# EAGLE board CntrlBoard (EAGLE 6.5.0)
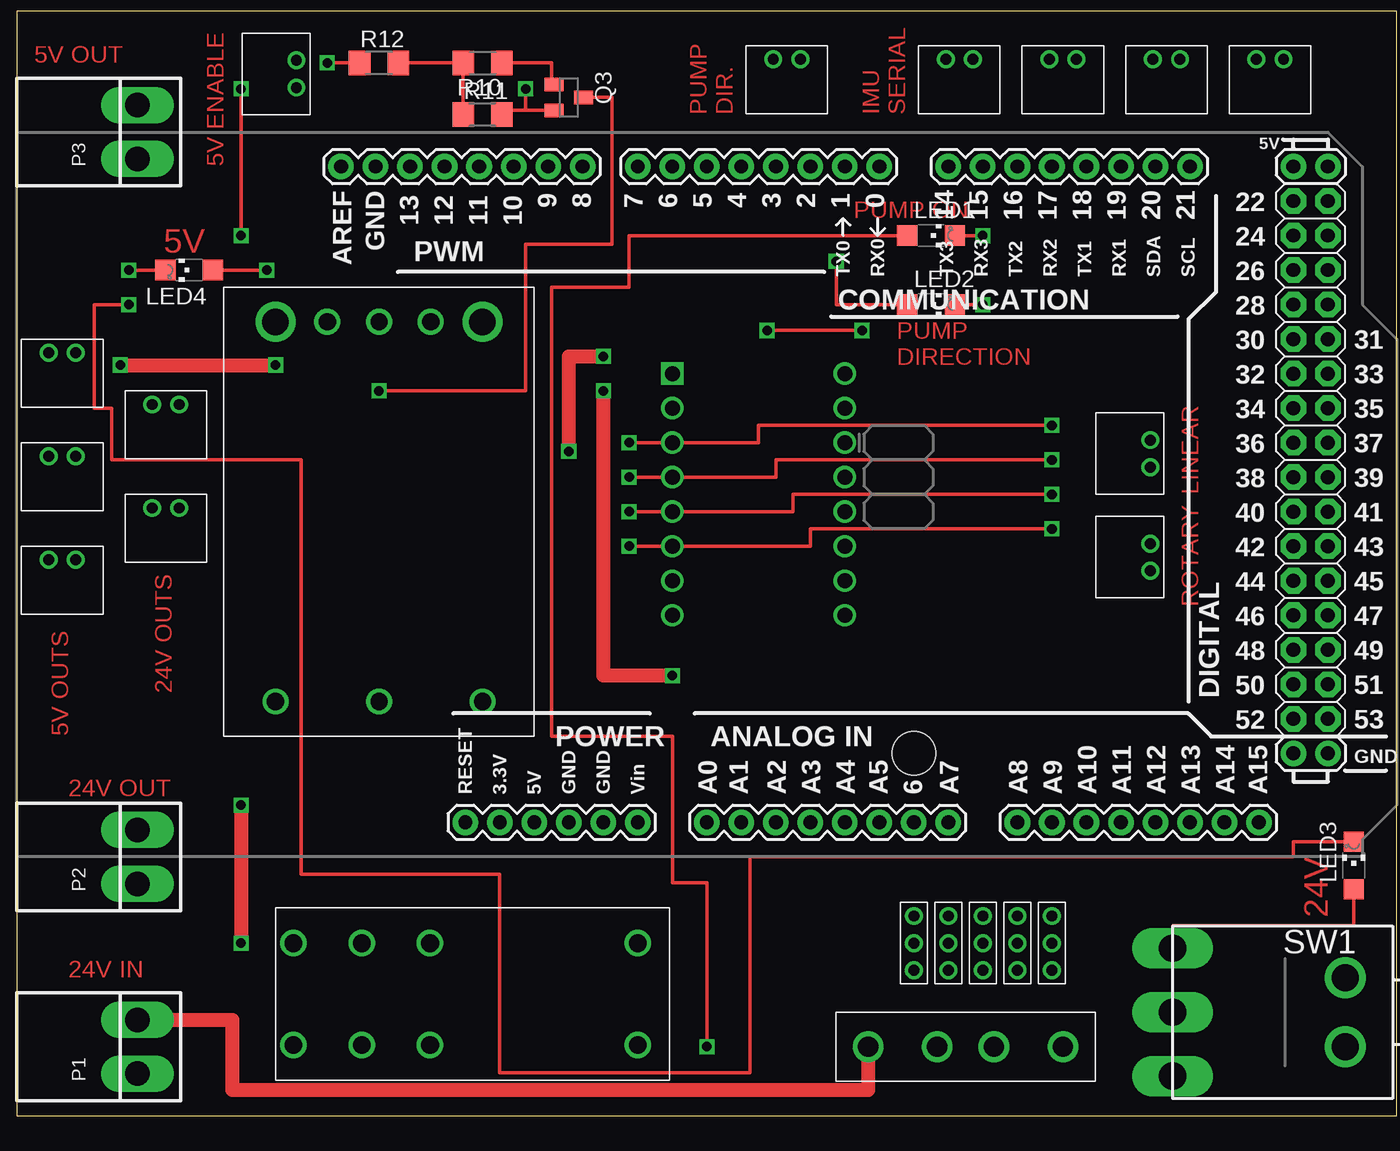
[diagram p0: board, top side]
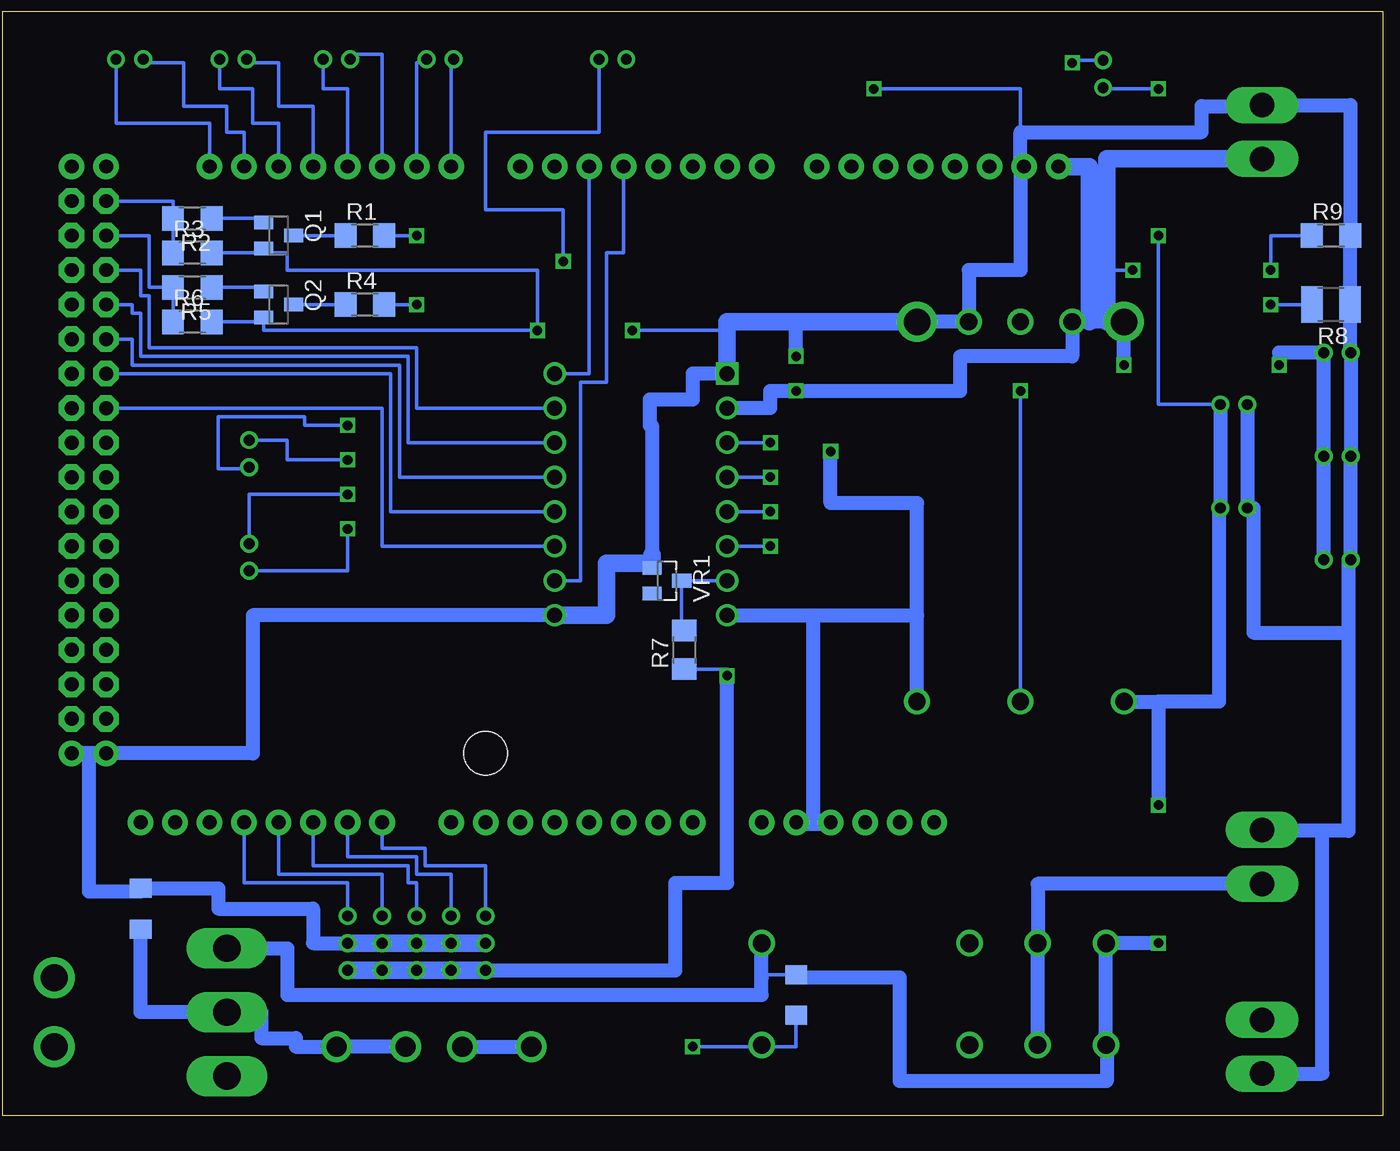
[diagram p1: board, bottom side, seen from below]

No outline drawn. Coordinates in mm, seen from the top.
Copper layers (1*16): Top 0.035mm / dielectric 1.5mm / Bottom 0.035mm
Design rules "default *": minimum track width 10mil, minimum drill 24mil, track to track 10mil, track to pad 10mil, pad to pad 10mil, via to via 10mil, smd to smd 10mil, copper to edge 40mil, drill to drill 10mil, minimum pad ring 10mil, minimum via ring 8mil, stop-mask expansion 4mil, vias tented up to drill 0mil, thermal gap 10mil
Milling: 4 lines

## Footprints (pad centres in the part's own frame; a part is rotated, then mirrored left to right if it is on the bottom)
CD1206 = smd 1.397 x 1.6: A -1.499,0; K 1.499,0
CHIPLED_1206 = smd 1.5 x 1.5: A 0,-1.75; C 0,1.75
22-23-2021 = drill 1.801 long: 1 -1.981,0; 2 1.981,0
DF3A-2P-2DSA = drill 0.8: P$1 2,1.001; P$2 4,1.001
3PIN_2MMPITCH = drill 0.8: P$1 -1.999,0; P$2 0,0; P$3 1.999,0
KHHD006A0A41Z = drill 1.27: P$1 2.54,19.05; P$2 2.54,11.43; P$3 2.54,3.81; P$5 30.48,7.62; P$6 30.48,11.43; P$7 30.48,15.24 | drill 1.956: P$4 30.48,3.81; P$8 30.48,19.05
SOT23 = smd 1 x 1.4: 1 -0.95,-1.1; 2 0.95,-1.1; 3 0,1.1
R1206 = smd 1.6 x 1.803: 1 -1.422,0; 2 1.422,0
R1210 = smd 1.6 x 2.7: 1 -1.4,0; 2 1.4,0
RTE = drill 1.3: P$1 0,0; P$2 15.291,0; P$3 20.32,0; P$4 25.349,0; P$5 25.349,7.493; P$6 20.32,7.493; P$7 15.291,7.493; P$8 0,7.493
TL3XWO = drill 1.999 long: 1 -4.699,-12.7; 2 0,-12.7; 3 4.699,-12.7 | drill 1.999: M1 -2.54,0; M2 2.54,0
ARDUINO_MEGA = drill 1.016 pad 1.88: 0 63.5,50.8; 1 60.96,50.8; 2 58.42,50.8; 3 55.88,50.8; 3.3V 35.56,2.54; 4 53.34,50.8; 5 50.8,50.8; 5V@0 38.1,2.54; 5V@1 93.98,50.8; 5V@2 96.52,50.8; 6 48.26,50.8; 7 45.72,50.8; 8 41.656,50.8; 9 39.116,50.8; 10 36.576,50.8; 11 34.036,50.8; 12 31.496,50.8; 13 28.956,50.8; 14 68.58,50.8; 15 71.12,50.8; 16 73.66,50.8; 17 76.2,50.8; 18 78.74,50.8; 19 81.28,50.8; 20 83.82,50.8; 21 86.36,50.8; A0 50.8,2.54; A1 53.34,2.54; A2 55.88,2.54; A3 58.42,2.54; A4 60.96,2.54; A5 63.5,2.54; A6 66.04,2.54; A7 68.58,2.54; A8 73.66,2.54; A9 76.2,2.54; A10 78.74,2.54; A11 81.28,2.54; A12 83.82,2.54; A13 86.36,2.54; A14 88.9,2.54; A15 91.44,2.54; AREF 23.876,50.8; GND@0 40.64,2.54; GND@1 43.18,2.54; GND@2 93.98,7.62; GND@3 96.52,7.62; GND@4 26.416,50.8; RESET 33.02,2.54; VIN 45.72,2.54 | drill 1.016 pad 1.88 octagon: 22 93.98,48.26; 23 96.52,48.26; 24 93.98,45.72; 25 96.52,45.72; 26 93.98,43.18; 27 96.52,43.18; 28 93.98,40.64; 29 96.52,40.64; 30 93.98,38.1; 31 96.52,38.1; 32 93.98,35.56; 33 96.52,35.56; 34 93.98,33.02; 35 96.52,33.02; 36 93.98,30.48; 37 96.52,30.48; 38 93.98,27.94; 39 96.52,27.94; 40 93.98,25.4; 41 96.52,25.4; 42 93.98,22.86; 43 96.52,22.86; 44 93.98,20.32; 45 96.52,20.32; 46 93.98,17.78; 47 96.52,17.78; 48 93.98,15.24; 49 96.52,15.24; 50 93.98,12.7; 51 96.52,12.7; 52 93.98,10.16; 53 96.52,10.16 | hole 3.2: 66.04,7.62
FUSE_HOLDER_ATC = drill 1.5: P$1 -7.163,0; P$2 -2.083,0; P$3 2.083,0; P$4 7.163,0
POLOLU713 = drill 1.1: AIN1 13.97,13.97; AIN2 13.97,16.51; AO1 1.27,13.97; AO2 1.27,11.43; BIN1 13.97,8.89; BIN2 13.97,6.35; BO1 1.27,6.35; BO2 1.27,8.89; GND_2 1.27,1.27; GND_3 13.97,1.27; PWMA 13.97,19.05; PWMB 13.97,3.81; STDBY_N 13.97,11.43; VCC 1.27,16.51; VMOT 1.27,3.81 | drill 1.1 square: GND1 1.27,19.05

## Placement (x,y rotation side)
D1  CD1206-S01575  [CD1206]  43.18,8.89 90 bottom
D2  CD1206-S01575  [CD1206]  91.44,15.24 270 bottom
LED1  [CHIPLED_1206]  67.31,64.77 270 top
LED2  [CHIPLED_1206]  67.31,59.69 270 top
LED3  [CHIPLED_1206]  98.42,18.41 0 top
LED4  [CHIPLED_1206]  12.7,62.23 90 top
P1  22-23-2021  [22-23-2021]  8.89,5.08 90 top
P2  22-23-2021  [22-23-2021]  8.89,19.05 90 top
P3  22-23-2021  [22-23-2021]  8.89,72.39 90 top
P4  DF3A-2P-2DSA  [DF3A-2P-2DSA]  84.45,45.72 90 top
P5  DF3A-2P-2DSA  [DF3A-2P-2DSA]  84.45,38.1 90 top
P6  DF3A-2P-2DSA  [DF3A-2P-2DSA]  21.59,73.66 90 top
P7  3PIN2MMPITCH  [3PIN_2MMPITCH]  66.04,12.7 270 top
P8  3PIN2MMPITCH  [3PIN_2MMPITCH]  68.58,12.7 270 top
P9  3PIN2MMPITCH  [3PIN_2MMPITCH]  71.12,12.7 270 top
P10  3PIN2MMPITCH  [3PIN_2MMPITCH]  73.66,12.7 270 top
P11  3PIN2MMPITCH  [3PIN_2MMPITCH]  76.2,12.7 270 top
P12  DF3A-2P-2DSA  [DF3A-2P-2DSA]  13.97,45.72 180 top
P13  DF3A-2P-2DSA  [DF3A-2P-2DSA]  13.97,53.34 180 top
P14  DF3A-2P-2DSA  [DF3A-2P-2DSA]  6.35,57.15 180 top
P15  DF3A-2P-2DSA  [DF3A-2P-2DSA]  6.35,41.91 180 top
P16  DF3A-2P-2DSA  [DF3A-2P-2DSA]  6.35,49.53 180 top
P17  DF3A-2P-2DSA  [DF3A-2P-2DSA]  72.39,78.74 180 top
P18  DF3A-2P-2DSA  [DF3A-2P-2DSA]  87.63,78.74 180 top
P19  DF3A-2P-2DSA  [DF3A-2P-2DSA]  80.01,78.74 180 top
P20  DF3A-2P-2DSA  [DF3A-2P-2DSA]  95.25,78.74 180 top
P21  DF3A-2P-2DSA  [DF3A-2P-2DSA]  59.69,78.74 180 top
PS1  KHHD006A0A41Z  [KHHD006A0A41Z]  38.1,27.94 90 top
Q1  BSS123  [SOT23]  81.28,64.77 270 bottom
Q2  BSS123  [SOT23]  81.28,59.69 270 bottom
Q3  BSS123  [SOT23]  40.64,74.93 270 top
R1  [R1206]  74.93,64.77 0 bottom
R2  100R  [R1206]  87.63,66.04 180 bottom
R3  1K0  [R1206]  87.63,63.5 0 bottom
R4  [R1206]  74.93,59.69 0 bottom
R5  100R  [R1206]  87.63,60.96 180 bottom
R6  1K0  [R1206]  87.63,58.42 0 bottom
R7  [R1206]  51.44,34.29 90 bottom
R8  1K8  [R1210]  3.81,59.69 180 bottom
R9  113R  [R1206]  3.81,64.77 0 bottom
R10  100R  [R1206]  34.29,77.47 180 top
R11  1K0  [R1206]  34.29,73.66 0 top
R12  2K8  [R1206]  26.67,77.47 0 top
RL1  RTE  [RTE]  45.72,12.7 180 top
SW1  TL32WO  [TL3XWO]  97.79,7.62 270 top
U1  ARDUINO-MEGAFULL  [ARDUINO_MEGA]  0,19.05 0 top
U$1  ATC_FUSE_HOLDER  [FUSE_HOLDER_ATC]  69.85,5.08 180 top
U$2  POLOLU713  [POLOLU713]  46.99,35.56 0 top
VR1  [SOT23]  52.7,39.37 270 bottom

## Library data of the parts
D1 D2 VR1 = diode
LED1-LED4 = led
P1-P3 = con-molex; MF: MOLEX; MPN: 22-23-2021; OC_FARNELL: 1462926; OC_NEWARK: 25C3832
P4-P21 = con-3m
PS1 = dc-dc-converter
Q1-Q3 = transistor-small-signal
R1-R12 = resistor
RL1 = relay
SW1 = switch
U1 = SparkFun-Boards
U$1 = fuse
U$2 = adafruit

## Nets
+5V: LED4.A P3.1 P7.P$3 P8.P$3 P9.P$3 P10.P$3 P11.P$3 P14.P$1 P15.P$1 P16.P$1 PS1.P$7 PS1.P$8 R7.1 U1.AREF U$2.VCC
AIN1: U1.28 U$2.AIN1
AIN2: U1.26 U$2.AIN2
BIN1: U1.32 U$2.BIN1
BIN2: U1.34 U$2.BIN2
GND: D2.A P1.1 P2.2 P3.2 P7.P$2 P8.P$2 P9.P$2 P10.P$2 P11.P$2 P12.P$2 P13.P$2 P14.P$2 P15.P$2 P16.P$2 PS1.P$3 PS1.P$4 PS1.P$5 Q1.2 Q2.2 Q3.2 R3.2 R6.2 R8.1 R9.2 R11.2 U1.GND@0 U1.GND@1 U1.GND@2 U1.GND@3 U1.GND@4 U$2.GND1 U$2.GND_2 U$2.GND_3 VR1.1
IMU_RX: P17.P$2 U1.14
IMU_TX: P17.P$1 U1.15
LIN_POS: P8.P$1 U1.A9
N$1: P1.2 U$1.P$3 U$1.P$4
N$2: D1.A LED1.A RL1.P$8
N$3: D2.K SW1.2 U$1.P$1 U$1.P$2
N$4: P2.1 RL1.P$3 RL1.P$6
N$5: LED1.C R1.2
N$6: Q1.3 R1.1
N$7: Q2.3 R4.1
N$8: Q1.1 R2.1
N$9: LED2.C R4.2
N$10: LED4.C R9.1
N$11: Q2.1 R5.1
N$12: LED3.C R8.2
N$13: R10.2 R11.1 R12.2
N$14: Q3.1 R10.1
N$15: P6.P$2 R12.1
N$16: PS1.P$2 Q3.3
N$17: P4.P$1 U$2.AO1
N$18: P4.P$2 U$2.AO2
N$19: P5.P$1 U$2.BO1
N$20: P5.P$2 U$2.BO2
N$21: R7.2 U$2.VMOT VR1.3
PUMP_DIR: R5.2 R6.1 U1.24
PUMP_DIR_RELAY: LED2.A P21.P$1
PUMP_ON: R2.2 R3.1 U1.22
PWMA: U1.2 U$2.PWMA
PWMB: U1.3 U$2.PWMB
ROT_POS: P9.P$1 U1.A10
RX1: P18.P$1 U1.19
RX2: P19.P$1 U1.17
SCL: P20.P$1 U1.21
SDA: P20.P$2 U1.20
SPARE_ANALOG1: P10.P$1 U1.A11
SPARE_ANALOG2: P11.P$1 U1.A12
STDBY_N: U1.30 U$2.STDBY_N
TANK_LEVEL: P7.P$1 U1.A8
TX1: P18.P$2 U1.18
TX2: P19.P$2 U1.16
VCC: D1.K LED3.A P6.P$1 P12.P$1 P13.P$1 PS1.P$1 RL1.P$1 RL1.P$4 RL1.P$5 SW1.1

## Tracks (layer width: path | path; a pad name or v marks a point on that pad's centre or on a via)
+5V  (via drill 0.7)
  Top 0.254: LED4.A v18.41,62.23
  Top 1.016: v7.62,55.24 v19.05,55.24 | v48.26,32.38 43.18,32.38 v43.18,53.34
  Bottom 0.254: v18.41,62.23 20.32,62.23 | R7.1 48.26,32.87 v48.26,32.38
  Bottom 1.016: 20.32,58.42 21.59,58.42 PS1.P$7 22.86,55.88 31.11,55.88 31.11,53.34 v43.18,53.34 45.09,53.34 45.09,52.07 U$2.VCC | P15.P$1 P16.P$1 P14.P$1 7.62,56.15 v7.62,55.24 | v19.05,55.24 PS1.P$8 | P7.P$3 52.07,10.7 52.07,17.14 48.26,17.14 v48.26,32.38
  Bottom 1.27: PS1.P$8 20.32,58.42 20.32,62.23 20.32,70.41 P3.1 | U1.AREF 21.59,69.85 21.59,58.42 | P7.P$3 P8.P$3 P9.P$3 P10.P$3 P11.P$3
AIN1
  Bottom 0.254: U1.28 92.08,59.69 92.08,59.05 91.44,59.05 91.44,55.88 71.75,55.88 71.75,49.53 U$2.AIN1
AIN2
  Bottom 0.254: U1.26 91.44,62.23 91.44,60.33 90.81,60.33 90.81,56.52 71.12,56.52 71.12,52.07 U$2.AIN2
BIN1
  Bottom 0.254: U1.32 73.03,54.61 73.03,44.45 U$2.BIN1
BIN2
  Bottom 0.254: U1.34 73.66,52.07 73.66,41.91 U$2.BIN2
GND  (via drill 0.7)
  Top 0.254: R11.2 35.71,73.98 37.47,73.98 | Q3.2 37.47,73.98 | 37.47,73.98 v37.47,75.56 | v62.23,57.78 v55.24,57.78
  Top 1.016: v40.64,48.9 40.64,55.88 v43.18,55.88
  Bottom 0.254: R3.2 82.38,63.5 | 82.38,63.5 Q1.2 | R6.2 82.38,58.42 Q2.2 82.38,57.78 v62.23,57.78 62.23,62.23 80.64,62.23 80.64,63.5 82.38,63.5 | v37.47,75.56 26.67,75.56 26.67,72.39 | v55.24,57.78 48.26,57.78
  Bottom 1.016: P1.1 4.45,3.1 4.45,20.95 | 4.45,20.95 8.89,20.95 P2.2 | 2.54,35.56 2.54,40.91 P15.P$2 P16.P$2 P14.P$2 2.41,56.15 R8.1 2.39,59.69 R9.2 2.39,74.37 8.26,74.37 | 2.54,35.56 2.54,20.95 4.45,20.95 | 2.54,35.56 9.53,35.56 9.53,44.72 P12.P$2 P13.P$2 | PS1.P$4 PS1.P$5 30.48,62.23 26.67,62.23 26.67,69.85 | P3.2 8.26,74.37 | U1.GND@4 26.67,69.85 | 26.67,69.85 26.67,72.39 13.34,72.39 13.34,74.3 8.26,74.3 8.26,74.37 | P11.P$2 78.74,12.7 78.74,15.24 85.72,15.24 85.72,16.74 D2.A 91.44,16.51 95.25,16.51 95.25,26.67 U1.GND@3 U1.GND@2 83.19,26.67 83.19,36.83 U$2.GND_3 | U$2.GND1 50.8,54.61 50.8,52.7 53.98,52.7 53.98,50.8 53.8,50.8 53.8,41.27 VR1.1 | PS1.P$3 34.29,36.83 | 34.29,36.83 34.29,45.09 40.64,45.09 v40.64,48.9 | v43.18,55.88 43.18,58.42 | U$2.GND_2 41.91,36.83 | 41.91,36.83 34.29,36.83 | U1.GND@0 41.91,21.59 41.91,36.83
  Bottom 1.27: U1.GND@0 U1.GND@1 | PS1.P$4 43.18,58.42 48.26,58.42 48.26,57.78 U$2.GND1 | P11.P$2 P10.P$2 P9.P$2 P8.P$2 P7.P$2 | U$2.GND_3 57.15,36.83 57.15,40.64 53.8,40.64 53.8,41.27
IMU_RX
  Bottom 0.254: P17.P$2 68.58,77.74 U1.14
IMU_TX
  Bottom 0.254: U1.15 71.12,77.47 70.39,77.47 P17.P$1
LIN_POS
  Bottom 0.254: U1.A9 76.2,19.05 71.12,19.05 71.12,17.78 68.58,17.78 P8.P$1
N$1
  Top 1.016: P1.2 15.88,7.06 15.88,1.91 62.69,1.91 U$1.P$4
  Bottom 1.016: U$1.P$3 U$1.P$4
N$2  (via drill 0.7)
  Top 0.254: LED1.A 45.09,64.77 45.09,60.96 39.37,60.96 39.37,27.94 48.26,27.94 48.26,17.14 50.8,17.14 v50.8,5.08
  Bottom 0.254: D1.A 43.18,5.08 45.72,5.08 | v50.8,5.08 45.72,5.08 | 45.72,5.08 RL1.P$8
N$3
  Bottom 1.016: U$1.P$2 U$1.P$1 80.01,5.08 80.01,5.71 82.55,5.71 82.55,7.62 SW1.2 91.44,7.62 D2.K
N$4
  Bottom 1.016: RL1.P$6 RL1.P$3 25.4,17.07 P2.1
N$5  (via drill 0.7)
  Top 0.254: v71.12,64.77 LED1.C
  Bottom 0.254: R1.2 v71.12,64.77
N$6
  Bottom 0.254: Q1.3 R1.1
N$7
  Bottom 0.254: Q2.3 R4.1
N$8
  Bottom 0.254: R2.1 82.38,66.04 Q1.1
N$9  (via drill 0.7)
  Top 0.254: v71.12,59.69 LED2.C
  Bottom 0.254: R4.2 v71.12,59.69
N$10  (via drill 0.7)
  Top 0.254: v8.26,62.23 LED4.C
  Bottom 0.254: R9.1 8.26,64.77 v8.26,62.23
N$11
  Bottom 0.254: R5.1 82.38,60.96 Q2.1
N$12  (via drill 0.7)
  Top 0.254: LED3.C 93.98,20.16 93.98,19.05 53.98,19.05 53.98,3.17 35.56,3.17 35.56,17.78 20.95,17.78 20.95,48.26 6.99,48.26 6.99,52.07 5.71,52.07 5.71,59.69 v8.26,59.69
  Bottom 0.254: v8.26,59.69 R8.2
N$13
  Top 0.254: R12.2 R10.2 R11.1
N$14
  Top 0.254: Q3.1 39.37,75.88 39.37,77.47 R10.1
N$15  (via drill 0.7)
  Top 0.254: v22.86,77.47 R12.1
  Bottom 0.254: P6.P$2 22.86,77.66 v22.86,77.47
N$16  (via drill 0.7)
  Top 0.254: Q3.3 43.81,74.93 43.81,64.14 37.47,64.14 37.47,53.34 v26.67,53.34
  Bottom 0.254: v26.67,53.34 PS1.P$2
N$17  (via drill 0.7)
  Top 0.254: v45.09,49.53 54.61,49.53 54.61,50.8 v76.2,50.8
  Bottom 0.254: U$2.AO1 v45.09,49.53 | v76.2,50.8 79.38,50.8 79.38,51.44 85.72,51.44 85.72,47.62 83.45,47.62 P4.P$1
N$18  (via drill 0.7)
  Top 0.254: v45.09,46.99 55.88,46.99 55.88,48.26 v76.2,48.26
  Bottom 0.254: U$2.AO2 v45.09,46.99 | P4.P$2 80.64,49.72 80.64,48.26 v76.2,48.26
N$19  (via drill 0.7)
  Top 0.254: v45.09,41.91 58.42,41.91 58.42,43.18 v76.2,43.18
  Bottom 0.254: U$2.BO1 v45.09,41.91 | P5.P$1 76.2,40.1 v76.2,43.18
N$20  (via drill 0.7)
  Top 0.254: v45.09,44.45 57.15,44.45 57.15,45.72 v76.2,45.72
  Bottom 0.254: U$2.BO2 v45.09,44.45 | v76.2,45.72 83.45,45.72 P5.P$2
N$21
  Bottom 0.254: U$2.VMOT VR1.3 51.6,35.71 R7.2
PUMP_DIR
  Bottom 0.254: U1.24 90.81,64.77 90.81,60.96 R5.2 R6.1
PUMP_DIR_RELAY  (via drill 0.7)
  Top 0.254: LED2.A 60.33,59.69 v60.33,62.87
  Bottom 0.254: v60.33,62.87 60.33,66.67 66.04,66.67 66.04,72.39 57.69,72.39 P21.P$1
PUMP_ON
  Bottom 0.254: U1.22 89.05,67.31 R2.2 R3.1
PWMA
  Bottom 0.254: U$2.PWMA 58.42,54.61 U1.2
PWMB
  Bottom 0.254: U$2.PWMB 59.05,39.37 59.05,53.98 57.15,53.98 57.15,63.5 55.88,63.5 U1.3
ROT_POS
  Bottom 0.254: U1.A10 78.74,18.41 71.75,18.41 71.75,17.14 71.12,17.14 P9.P$1
RX1
  Bottom 0.254: U1.19 81.28,73.03 83.19,73.03 83.19,75.56 85.63,75.56 P18.P$1
RX2
  Bottom 0.254: U1.17 76.2,75.56 78.01,75.56 P19.P$1
SCL
  Bottom 0.254: U1.21 86.36,73.03 93.25,73.03 P20.P$1
SDA
  Bottom 0.254: U1.20 83.82,72.39 85.09,72.39 85.09,74.3 88.27,74.3 88.27,77.47 91.25,77.47 P20.P$2
SPARE_ANALOG1
  Bottom 0.254: U1.A11 81.28,17.78 73.66,17.78 P10.P$1
SPARE_ANALOG2
  Bottom 0.254: U1.A12 83.82,17.14 76.2,17.14 P11.P$1
STDBY_N
  Bottom 0.254: U1.30 92.08,57.15 92.08,55.24 72.39,55.24 72.39,46.99 U$2.STDBY_N
TANK_LEVEL
  Bottom 0.254: U1.A8 73.66,19.68 70.48,19.68 70.48,18.41 66.04,18.41 P7.P$1
TX1
  Bottom 0.254: U1.18 78.74,74.3 81.28,74.3 81.28,77.47 83.63,77.47 P18.P$2
TX2
  Bottom 0.254: U1.16 73.66,78.11 76.01,78.11 P19.P$2
VCC  (via drill 0.7)
  Top 0.254: v16.51,64.77 v16.51,75.56 | LED3.A 98.42,13.97 85.09,13.97 SW1.1
  Top 1.016: v16.51,22.86 v16.51,12.7
  Bottom 0.254: D1.K 45.72,10.39 45.72,10.16 | P13.P$1 16.51,52.34 v16.51,64.77 | v16.51,75.56 20.59,75.56 P6.P$1
  Bottom 1.016: SW1.1 80.64,12.32 80.64,8.89 45.72,8.89 45.72,10.16 RL1.P$1 | PS1.P$1 16.51,30.48 | 16.51,30.48 v16.51,22.86 | v16.51,12.7 RL1.P$4 RL1.P$5 20.32,5.21 20.32,2.54 35.56,2.54 35.56,10.16 43.18,10.16 D1.K | 16.51,30.48 12.06,30.48 12.06,44.72 P12.P$1 P13.P$1

## Text on the board
Top: 5V OUT | PUMP / DIR. | IMU / SERIAL | 5V ENABLE | PUMP ON | 5V | PUMP / DIRECTION | LINEAR | ROTARY | 24V OUTS | 5V OUTS | 24V OUT | 24V | 24V IN